# Altium PCB SeniorDesign.PcbDoc (part 1 of 2)
Units mil, origin at the board's own origin, x right, y up, seen from the top; angles counter-clockwise.
Board outline 3586 x 2237 mil, 4 copper layers (Top Layer, GND, PWR, Bottom Layer), stack 30.634 mil thick; 184 components, 148 nets, 619 pads, 132 vias.
Unrouted connection lines stored in the file: 8.
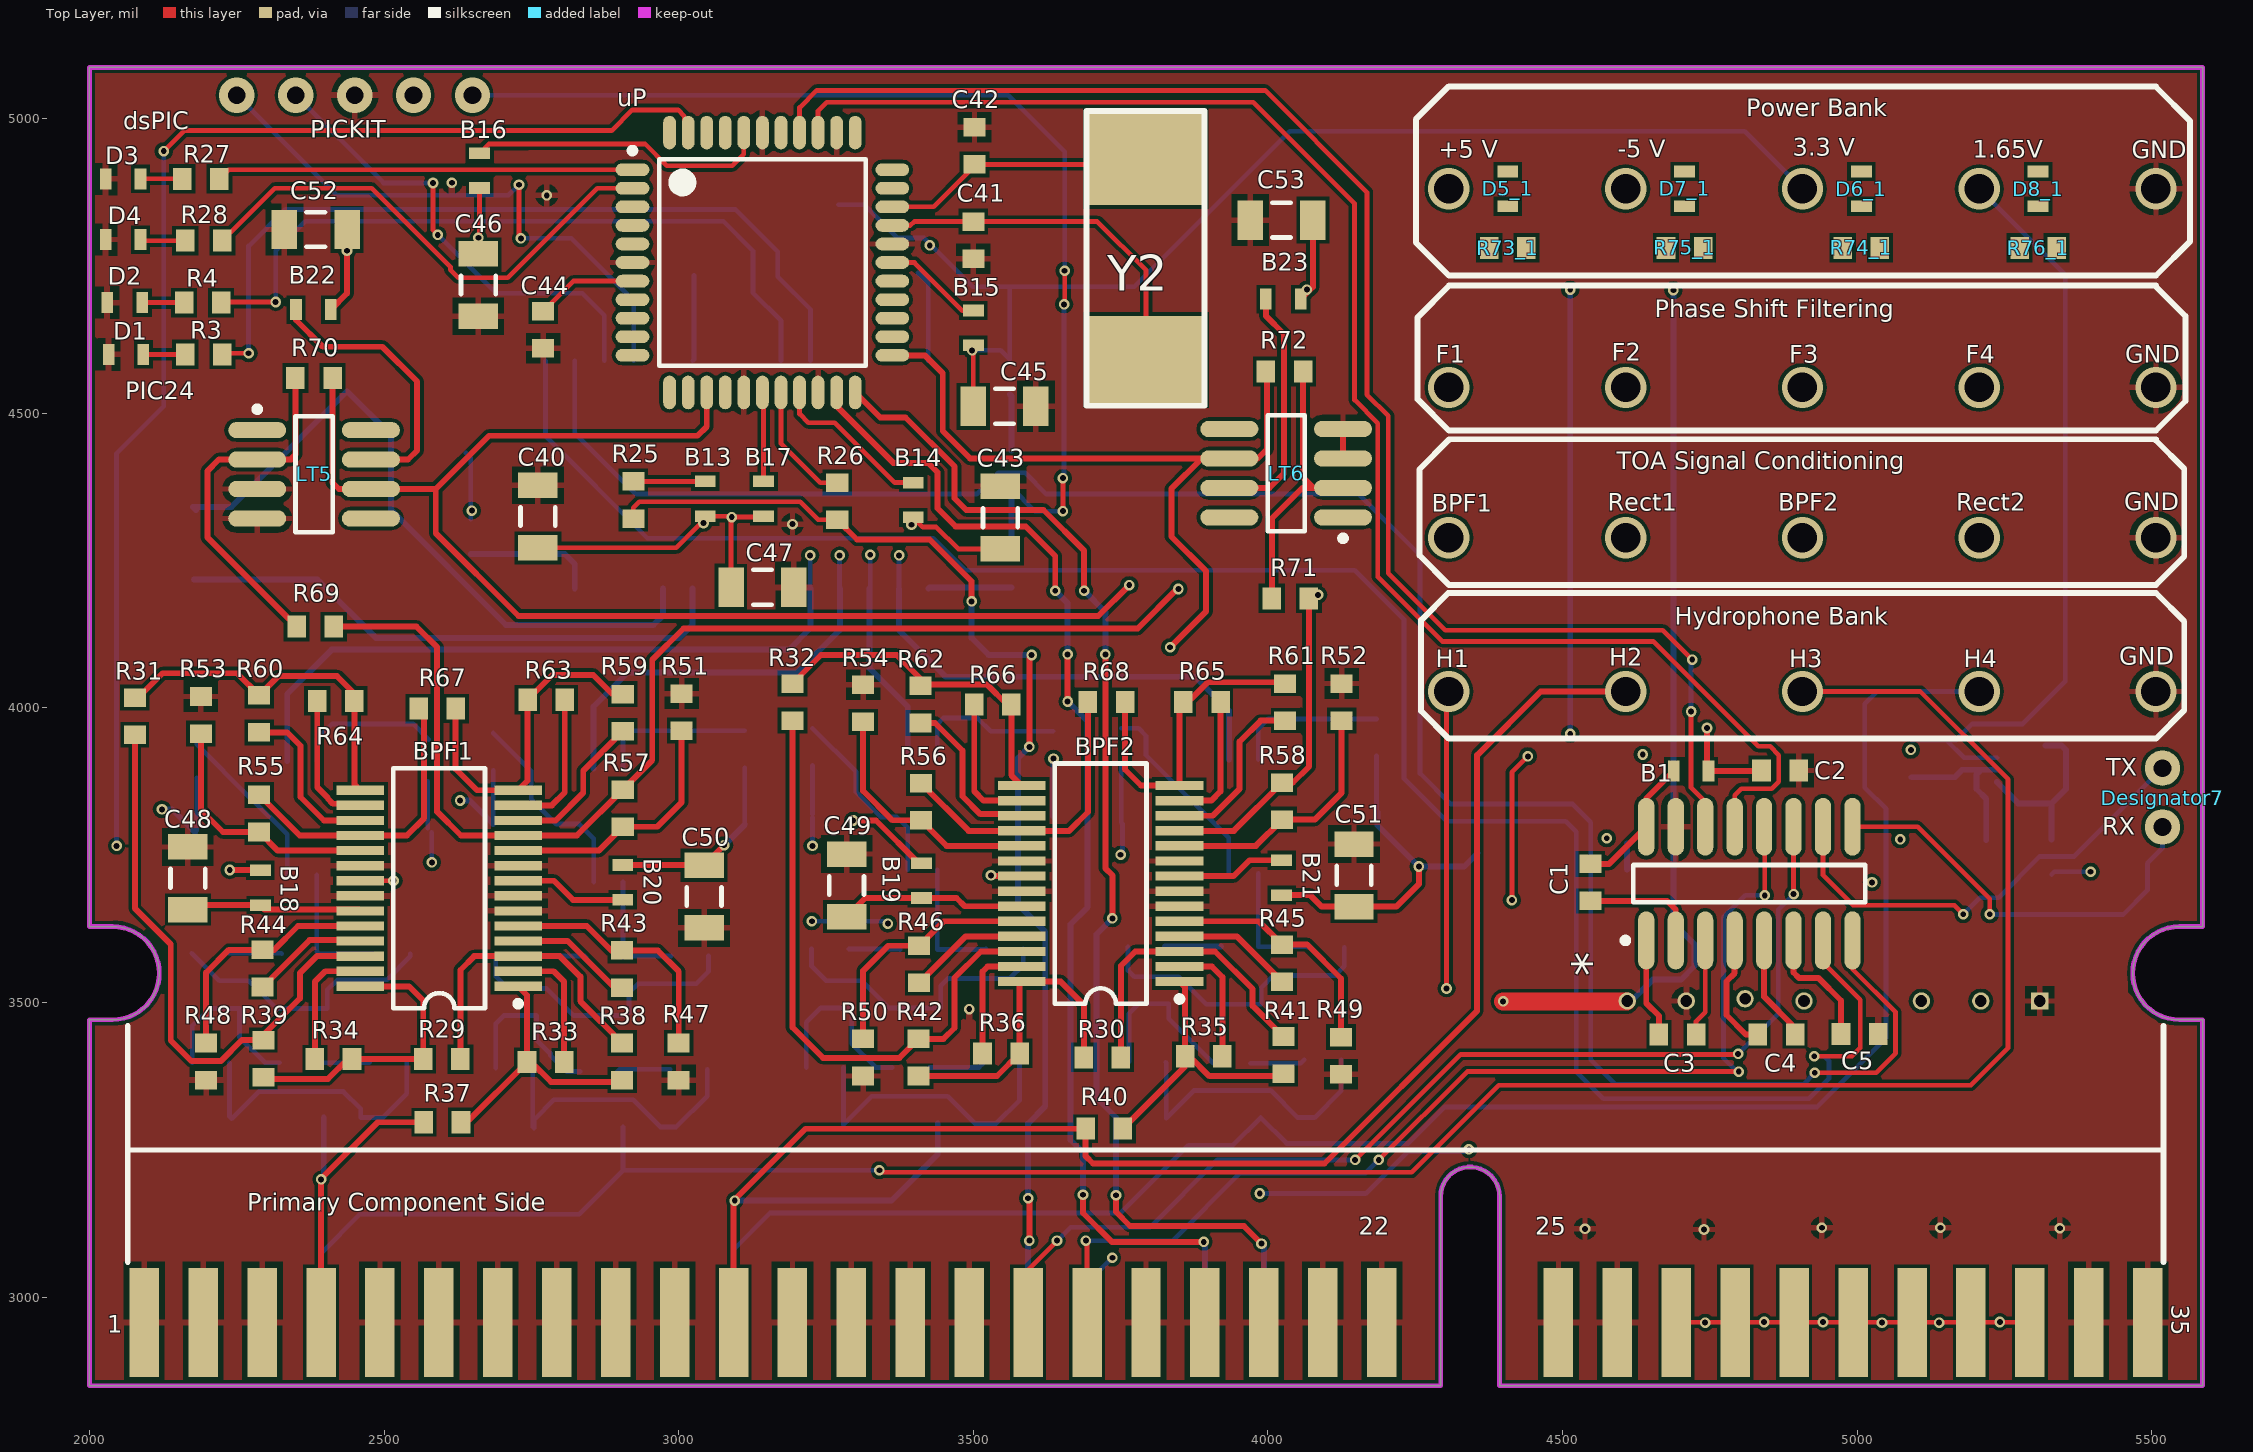
[diagram p0: Top Layer view]
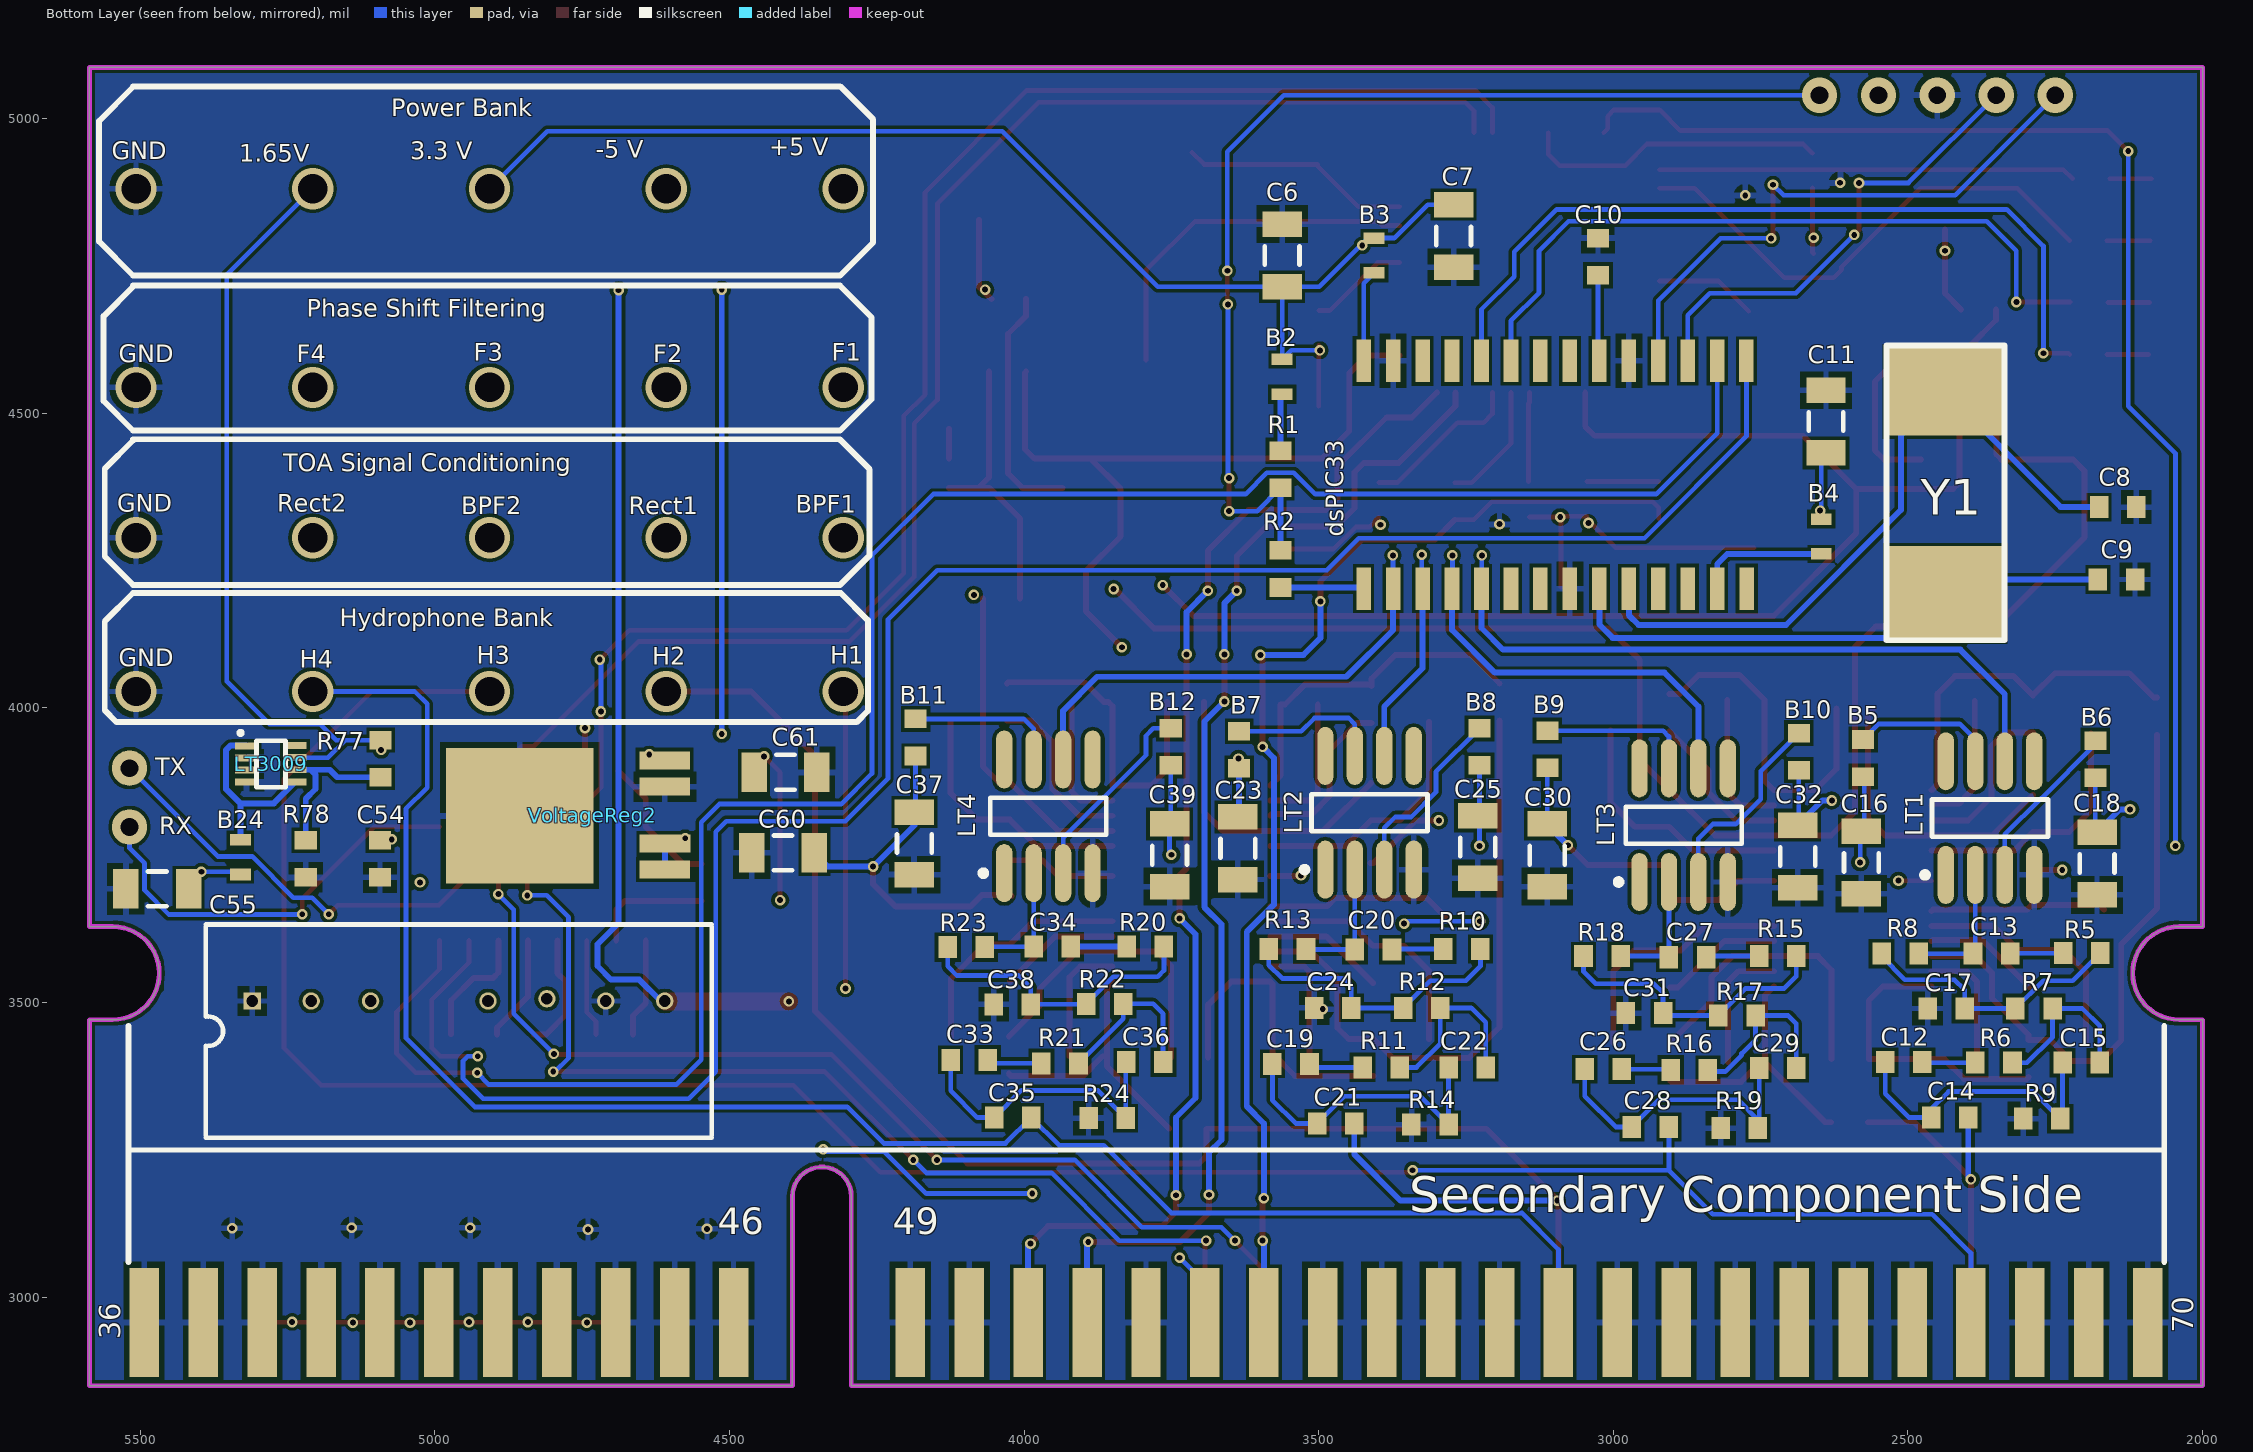
[diagram p1: Bottom Layer view, seen from below]
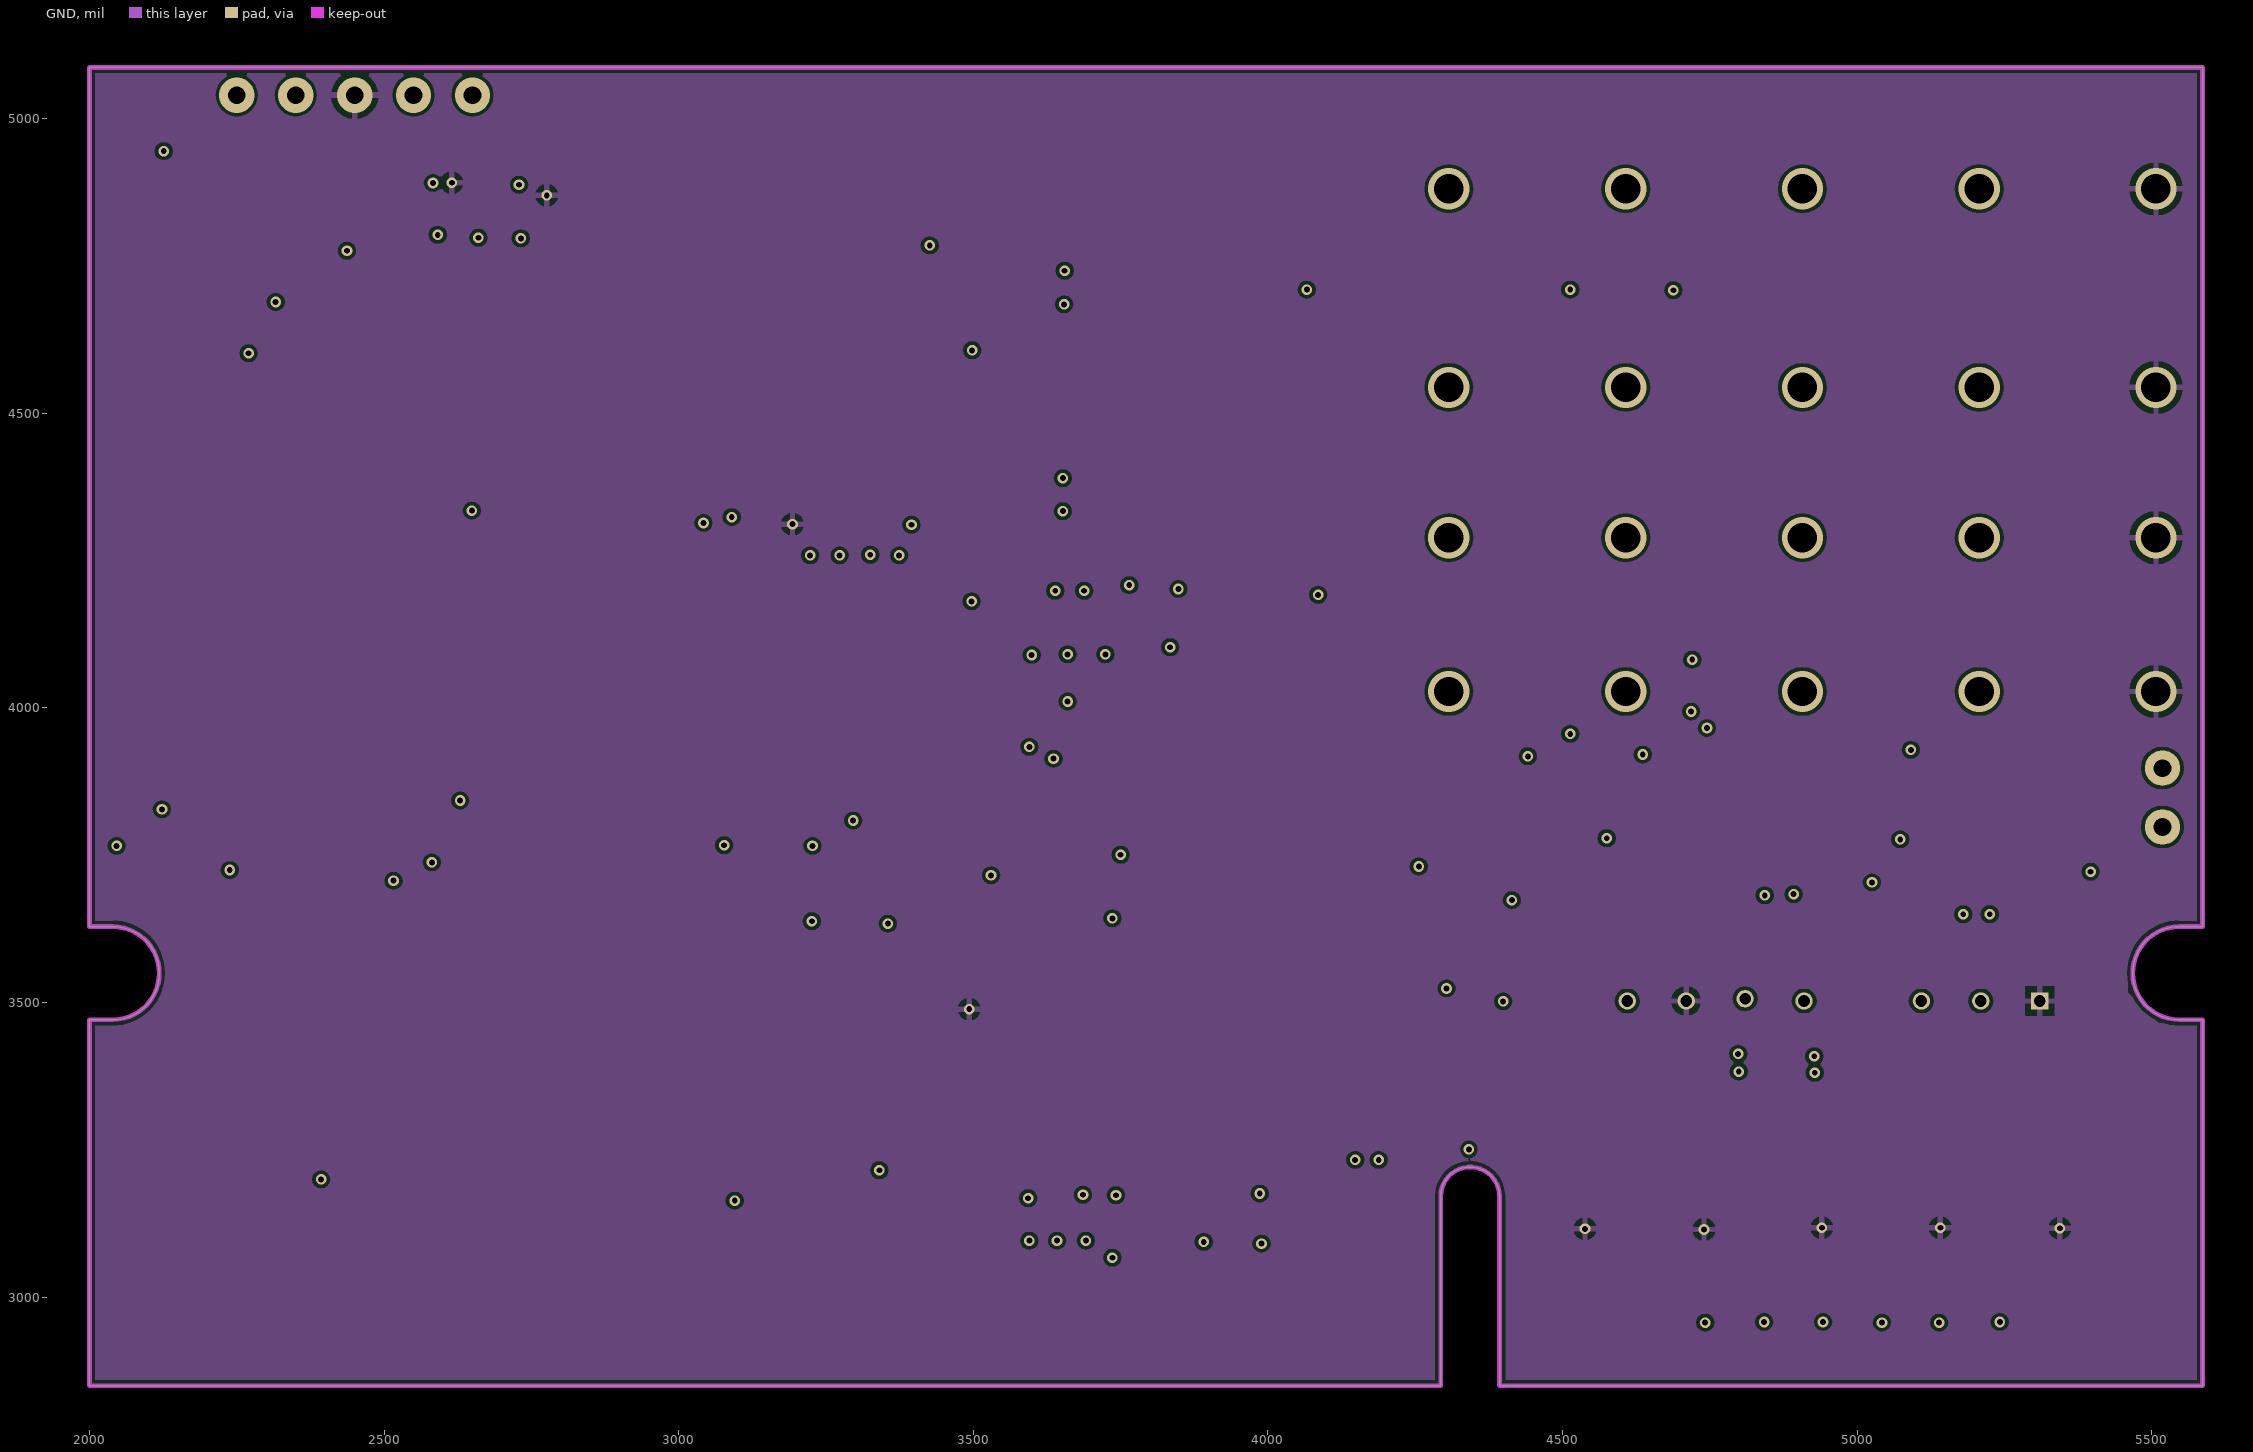
[diagram p2: GND]
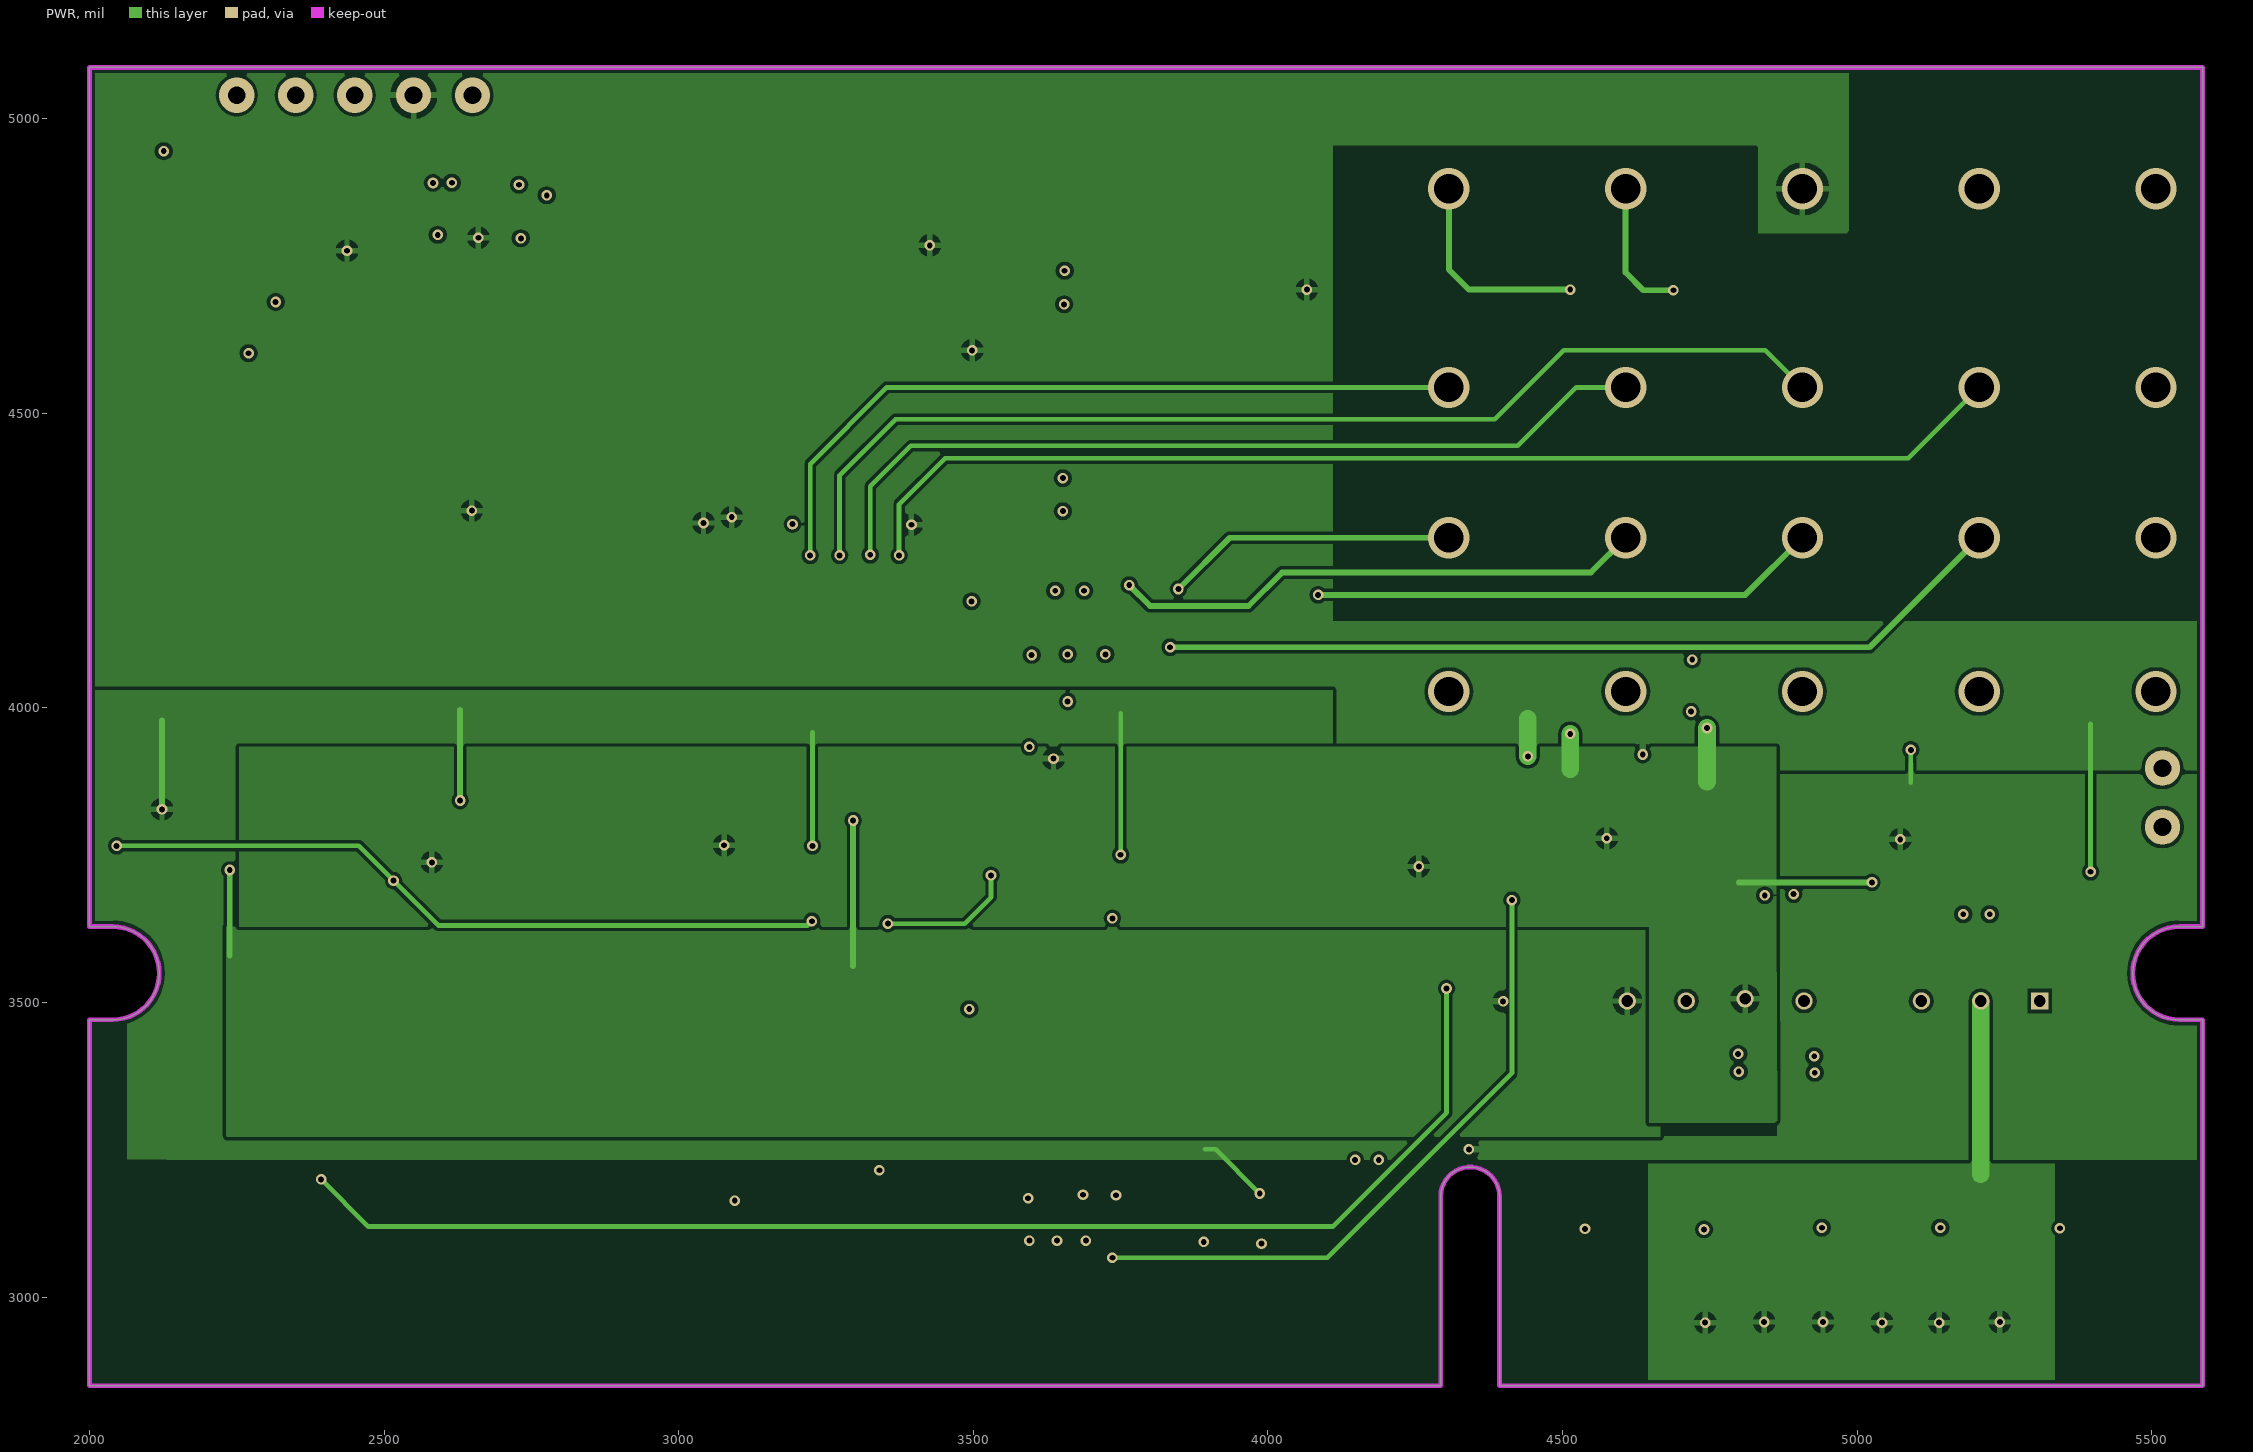
[diagram p3: PWR]
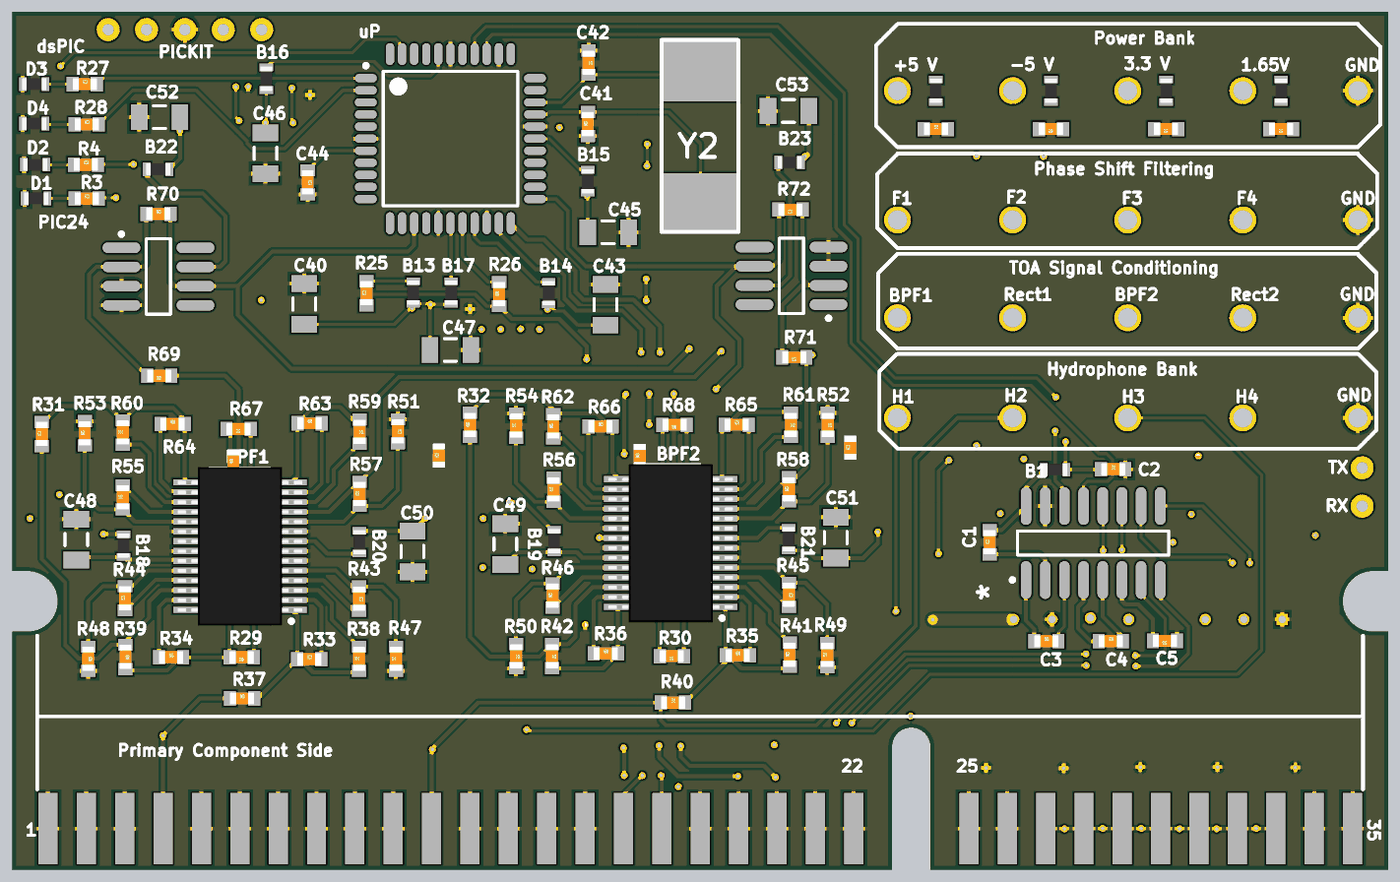
[diagram p5: 3D render of the assembled board from above, using the file's embedded part models]
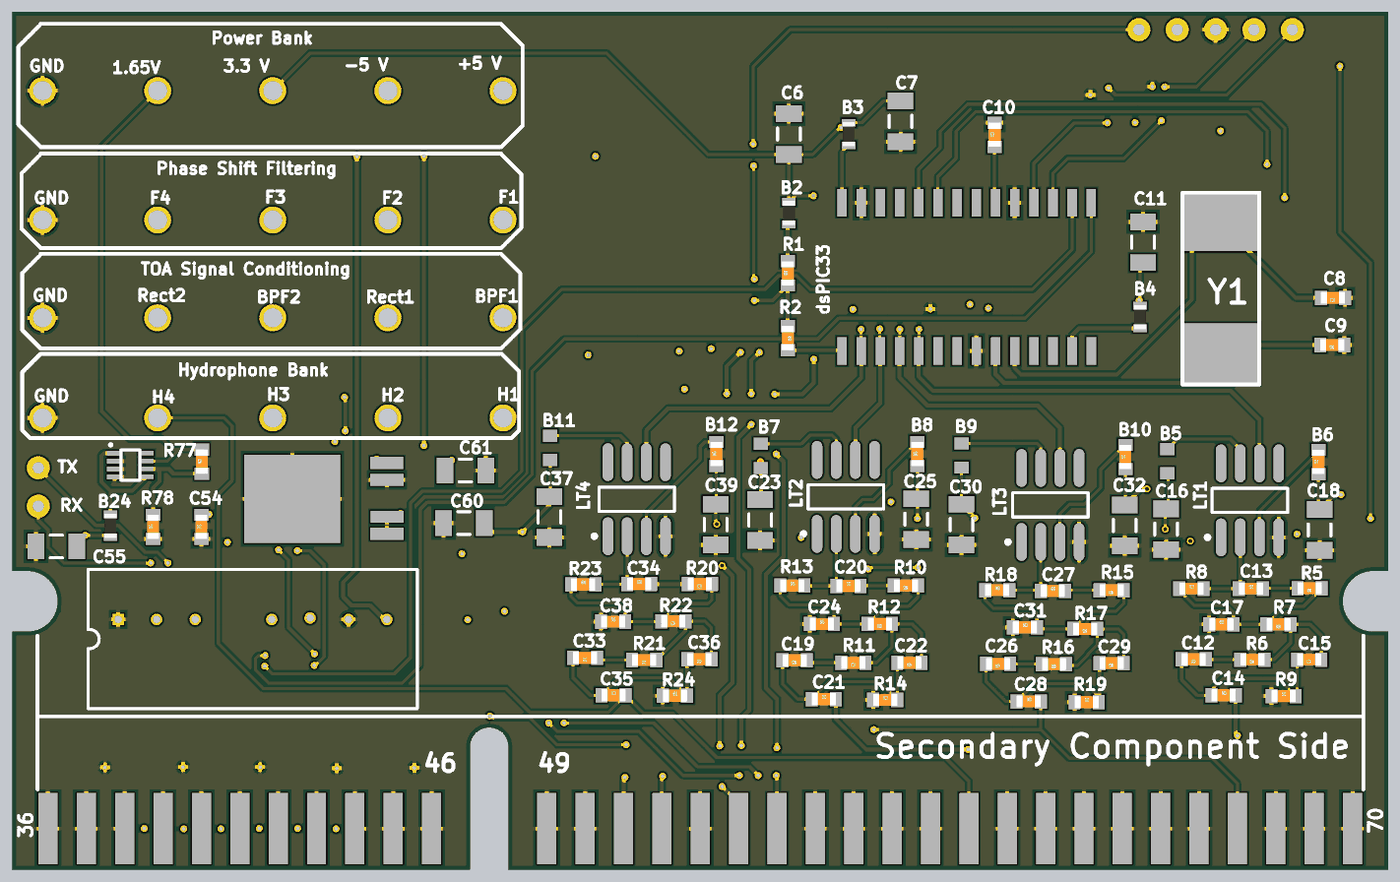
[diagram p6: 3D render of the assembled board from below, using the file's embedded part models]

## Layer stack, top to bottom
Top Solder: solder mask 0.4, Solder Resist, Dk 3.5
Top Layer: signal copper 1.4
Dielectric 1: core 10, FR-4, Dk 4.2
GND: signal copper 1.417
Dielectric 3: prepreg 5, Dk 4.2
PWR: signal copper 1.417
Dielectric 2: core 10, Dk 4.2
Bottom Layer: signal copper 1.4
Bottom Solder: solder mask 0.4, Solder Resist, Dk 3.5

## Board outline
2000,3471 2039.5,3471 ccw(c2039.5,3550) 2039.5,3629 2000,3629 2000,5087 5586,5087 5586,3629 5546.5,3629 ccw(c5546.5,3550) 5546.5,3471 5586,3471 5586,2850 4393,2850 4393,3171 ccw(c4343,3171) 4293,3171 4293,2850 2000,2850

## Design rules (kind name [scope] priority, off if disabled: settings)
Clearance [All] p1: gap=6
PolygonConnect [All] p1: connectstyle=Relief reliefconductorwidth=10 reliefentries=4 polygonreliefangle="90 Angle" airgapwidth=10
RoomDefinition Rectifiers [InComponentClass('Rectifiers')] p1 off: confinementstyle=ConfineIn formatcopy=TRUE lockcomponents=FALSE outline 0,0 2000,0 2000,1000 0,1000
RoomDefinition PowerSupply [InComponentClass('PowerSupply')] p2 off: confinementstyle=ConfineIn formatcopy=TRUE lockcomponents=FALSE outline 989,391 1662,391 1662,763 989,763
RoomDefinition PIC24Filter [InComponentClass('PIC24Filter')] p3 off: confinementstyle=ConfineIn formatcopy=TRUE lockcomponents=FALSE outline 0,0 2000,0 2000,1000 0,1000
RoomDefinition PIC24 [InComponentClass('PIC24')] p4 off: confinementstyle=ConfineIn formatcopy=TRUE lockcomponents=FALSE outline 0,0 2000,0 2000,1000 0,1000
RoomDefinition dsPIC_filter [InComponentClass('dsPIC_filter')] p5 off: confinementstyle=ConfineIn formatcopy=TRUE lockcomponents=FALSE outline 0,0 2000,0 2000,1000 0,1000
RoomDefinition dsPIC [InComponentClass('dsPIC')] p6 off: confinementstyle=ConfineIn formatcopy=TRUE lockcomponents=FALSE outline 0,0 2000,0 2000,1000 0,1000
RoomDefinition Comms [InComponentClass('Comms')] p7 off: confinementstyle=ConfineIn formatcopy=TRUE lockcomponents=FALSE outline 0,0 2000,0 2000,1000 0,1000
RoutingVias [All] p1: holewidth=12 width=25 viastyle="Through Hole" minholewidth=10 minwidth=18 maxholewidth=40 maxwidth=70
SolderMaskExpansion [All] p1: expansion=4
Width [All] p1: maxlimit=30 minlimit=6 preferedwidth=8 minimp=50.000000 maximp=50.000000 favimp=50.000000
29 further rules are at their usual default settings.

## Classes and differential pairs
component class PowerSupply: C60 C61
component class Comms: * B1 C1 C2 C3 C4 C5
component class dsPIC_filter: B5 B6 B7 B8 B9 B10 B11 B12 C12 C13 C14 C15 C16 C17 C18 C19 C20 C21 C22 C23 C24 C25 C26 C27 C28 C29 C30 C31 C32 C33 C34 C35 C36 C37 C38 C39 LT1 LT2 LT3 LT4 R5 R6 R7 R8 R9 R10 R11 R12 R13 R14 R15 R16 R17 R18 R19 R20 R21 R22 R23 R24
component class dsPIC: B2 B3 B4 C6 C7 C8 C9 C10 C11 D1 D2 dsPIC33 R1 R2 R3 R4 Y1
component class PIC24Filter: B18 B19 B20 B21 BPF1 BPF2 C48 C49 C50 C51 R29 R30 R31 R32 R33 R34 R35 R36 R37 R38 R39 R40 R41 R42 R43 R44 R45 R46 R47 R48 R49 R50 R51 R52 R53 R54 R55 R56 R57 R58 R59 R60 R61 R62 R63 R64 R65 R66 R67 R68
component class PIC24: B13 B14 B15 B16 B17 C40 C41 C42 C43 C44 C45 C46 C47 D3 D4 R25 R26 R27 R28 uP Y2
component class Rectifiers: B22 B23 C52 C53 LT5 LT6 R69 R70 R71 R72

## Components (designator, comment, footprint, x,y, rotation, side; value= is the part's Value field where it differs from the comment)
* "MAX232E" SO-16_M 4817,3702 r90 top
B1 "Ferrite Bead" "Resistor 0603" 4718,3893 r180 top
B2 "Ferrite Bead" "Resistor 0603" 3562,4562 r90 bottom
B3 "Ferrite Bead" "Resistor 0603" 3406,4768 r270 bottom
B4 "Ferrite Bead" "Resistor 0603" 2647,4291 r270 bottom
B5 "Ferrite Bead" "Capacitor 0603"#1 2576,3915 r270 bottom
B6 "Ferrite Bead" "Capacitor 0603"#2 2182,3913 r90 bottom
B7 "Ferrite Bead" "Capacitor 0603"#1 3635,3929 r270 bottom
B8 "Ferrite Bead" "Capacitor 0603"#2 3227,3934 r90 bottom
B9 "Ferrite Bead" "Capacitor 0603"#1 3112,3930 r270 bottom
B10 "Ferrite Bead" "Capacitor 0603"#2 2685,3926 r90 bottom
B11 "Ferrite Bead" "Capacitor 0603"#1 4184,3950 r270 bottom
B12 "Ferrite Bead" "Capacitor 0603"#2 3751,3934 r90 bottom
B13 "Ferrite Bead" "Resistor 0603" 3045,4355 r270 top
B14 "Ferrite Bead" "Resistor 0603" 3398,4353 r270 top
B15 "Ferrite Bead" "Resistor 0603" 3500,4645 r90 top
B16 "Ferrite Bead" "Resistor 0603" 2662,4912 r90 top
B17 "Ferrite Bead" "Resistor 0603" 3144,4355 r90 top
B18 "Ferrite Bead" "Resistor 0603" 2290,3695 r90 top
B19 "Ferrite Bead" "Resistor 0603" 3412,3707 r90 top
B20 "Ferrite Bead" "Resistor 0603" 2905,3704 r270 top
B21 "Ferrite Bead" "Resistor 0603" 4023,3712 r90 top
B22 "Ferrite Bead" "Resistor 0603" 2380,4676 r180 top
B23 "Ferrite Bead" "Resistor 0603" 4026,4694 r180 top
B24 "Ferrite Bead" "Resistor 0603" 5330,3747 r90 bottom
BPF1 "LTC1068-25IG SSOP-28" SSOP-28 2593.53,3694 r90 top
BPF2 "LTC1068-25IG SSOP-28" SSOP-28 3716,3702 r90 top
C1 "1uF Ceramic Low ESR" "Capacitor 0603"#2 4547,3704 r90 top
C2 "1uF Ceramic Low ESR" "Capacitor 0603"#2 4869,3894 r0 top
C3 "1uF Ceramic Low ESR" "Capacitor 0603"#2 4695,3446 r0 top
C4 "1uF Ceramic Low ESR" "Capacitor 0603"#2 4863,3446 r0 top
C5 "1uF Ceramic Low ESR" "Capacitor 0603"#2 5004,3447 r180 top
C6 "0.1uF 20V Ceramic Low ESR" C1206 3562,4768 r270 bottom
C7 "0.1uF 20V Ceramic Low ESR" C1206 3271,4801 r90 bottom
C8 "20pF" "Capacitor 0603"#2 2144,4341 r0 bottom
C9 "20pF" "Capacitor 0603"#2 2146,4218 r0 bottom
C10 "10uF 6.3V Ceramic or Tantalum Low ESR ~5 Ohm" "Capacitor 0603"#2 3026,4766 r90 bottom
C11 "0.1uF 20V Ceramic Low ESR" C1206 2639,4486 r270 bottom
C12 "0.0015uF" "Capacitor 0603"#2 2507,3399 r0 bottom
C13 "220pF" "Capacitor 0603"#2 2358,3583 r180 bottom
C14 "0.0015uF" "Capacitor 0603"#2 2429,3305 r180 bottom
C15 "0.0015uF" "Capacitor 0603"#2 2206,3398 r0 bottom
C16 ".1uF 20V Ceramic Low ESR" C1206 2579,3738 r270 bottom
C17 "0.0022uF" "Capacitor 0603"#2 2435,3490 r180 bottom
C18 ".1uF 20V Ceramic Low ESR" C1206 2179,3736 r270 bottom
C19 "0.0015uF" "Capacitor 0603"#2 3547,3396 r0 bottom
C20 "220pF" "Capacitor 0603"#2 3407,3590 r180 bottom
C21 "0.0015uF" "Capacitor 0603"#2 3471,3295 r180 bottom
C22 "0.0015uF" "Capacitor 0603"#2 3248,3390 r0 bottom
C23 ".1uF 20V Ceramic Low ESR" C1206 3637,3762 r270 bottom
C24 "0.0022uF" "Capacitor 0603"#2 3476,3491 r180 bottom
C25 ".1uF 20V Ceramic Low ESR" C1206 3230,3764 r270 bottom
C26 "0.0015uF" "Capacitor 0603"#2 3017,3387 r0 bottom
C27 "220pF" "Capacitor 0603"#2 2874,3577 r180 bottom
C28 "0.0015uF" "Capacitor 0603"#2 2937,3289 r180 bottom
C29 "0.0015uF" "Capacitor 0603"#2 2721,3389 r0 bottom
C30 ".1uF 20V Ceramic Low ESR" C1206 3112,3750 r270 bottom
C31 "0.0022uF" "Capacitor 0603"#2 2947,3482 r180 bottom
C32 ".1uF 20V Ceramic Low ESR" C1206 2687,3748 r270 bottom
C33 "0.0015uF" "Capacitor 0603"#2 4093,3403 r0 bottom
C34 "220pF" "Capacitor 0603"#2 3952,3595 r180 bottom
C35 "0.0015uF" "Capacitor 0603"#2 4019,3305 r180 bottom
C36 "0.0015uF" "Capacitor 0603"#2 3795,3399 r0 bottom
C37 ".1uF 20V Ceramic Low ESR" C1206 4186,3770 r270 bottom
C38 "0.0022uF" "Capacitor 0603"#2 4020,3497 r180 bottom
C39 ".1uF 20V Ceramic Low ESR" C1206 3753,3750 r270 bottom
C40 "0.1uF 20V Ceramic Low ESR" C1206 2761,4325 r270 top
C41 "20pF" "Capacitor 0603"#2 3500,4794 r90 top
C42 "20pF" "Capacitor 0603"#2 3502,4954 r270 top
C43 "0.1uF 20V Ceramic Low ESR" C1206 3546,4323 r270 top
C44 "10uF 6.3V Ceramic or Tantalum Low ESR ~5 Ohm" "Capacitor 0603"#2 2770,4642 r270 top
C45 "0.1uF 20V Ceramic Low ESR" C1206 3553,4512 r0 top
C46 "0.1uF 20V Ceramic Low ESR" C1206 2660,4718 r270 top
C47 "0.1uF 20V Ceramic Low ESR" C1206 3142,4205 r0 top
C48 ".1uF 20V Ceramic Low ESR" C1206 2167,3711 r90 top
C49 ".1uF 20V Ceramic Low ESR" C1206 3285,3699 r90 top
C50 ".1uF 20V Ceramic Low ESR" C1206 3043,3680 r270 top
C51 ".1uF 20V Ceramic Low ESR" C1206 4146,3716 r90 top
C52 ".1uF 20V Ceramic Low ESR" C1206 2384,4812 r180 top
C53 ".1uF 20V Ceramic Low ESR" C1206 4023,4828 r180 top
C54 "4.7uF 20V Ceramic" "Capacitor 0603"#2 5093,3744 r90 bottom
C55 ".1uF 20V Ceramic Low ESR" C1206 5471,3693 r0 bottom
C60 "15uF 20V Ceramic" C1206 4409,3754 r180 bottom
C61 "4.7uF 20V Ceramic" C1206 4405,3891 r0 bottom
D1 "LED2" "Resistor 0603" 2062,4600 r180 top
D2 "LED2" "Resistor 0603" 2060,4688 r180 top
D3 "LED2" "Resistor 0603" 2057,4898 r180 top
D4 "LED2" "Resistor 0603" 2057,4795 r180 top
D5_1 "LED2" "Resistor 0603" 4407,4881 r90 top (schematic designator D5)
D6_1 "LED2" "Resistor 0603" 5007,4881 r90 top (schematic designator D6)
D7_1 "LED2" "Resistor 0603" 4707,4881 r90 top (schematic designator D7)
D8_1 "LED2" "Resistor 0603" 5307,4881 r90 top (schematic designator D8)
Designator7 "Comment" "Header 2 Pin 2.54mm" 5518,3898 r0 top
dsPIC33 "dsPIC33EP64GS502" "SOIC 28" 3150,4034 r90 bottom
LT1 "LT1677 SO8 Package" SO8 2370,3809 r90 bottom
LT2 "LT1677 SO8 Package" SO8 3423,3818 r90 bottom
LT3 "LT1677 SO8 Package" SO8 2890,3797 r90 bottom
LT4 "LT1677 SO8 Package" SO8 3968,3812 r90 bottom
LT5 "LT1677 SO8 Package" SO8 2377,4406 r0 top
LT6 "LT1677 SO8 Package" SO8 4035,4389 r180 top
LT3009 "LT3009" "SC8 Package" 5278,3905 r180 bottom
R1 "1/16 w 10K ohms 1%" "Capacitor 0603"#2 3565,4405 r90 bottom
R2 "470" "Capacitor 0603"#2 3565,4236 r270 bottom
R3 "200 ohms 1%" "Capacitor 0603"#2 2194,4600 r0 top
R4 "200 ohms 1%" "Capacitor 0603"#2 2192,4688 r0 top
R5 "9.1K" "Capacitor 0603"#2 2205,3584 r0 bottom
R6 "6.8K" "Capacitor 0603"#2 2354,3398 r0 bottom
R7 "2K" "Capacitor 0603"#2 2286,3490 r0 bottom
R8 "7.5K" "Capacitor 0603"#2 2513,3583 r180 bottom
R9 "2K" "Capacitor 0603"#2 2273,3303 r180 bottom
R10 "9.1K" "Capacitor 0603"#2 3257,3591 r0 bottom
R11 "6.8K" "Capacitor 0603"#2 3394,3390 r0 bottom
R12 "2K" "Capacitor 0603"#2 3325,3491 r0 bottom
R13 "7.5K" "Capacitor 0603"#2 3553,3591 r180 bottom
R14 "2K" "Capacitor 0603"#2 3311,3293 r180 bottom
R15 "9.1K" "Capacitor 0603"#2 2721,3579 r0 bottom
R16 "6.8K" "Capacitor 0603"#2 2871,3386 r0 bottom
R17 "2K" "Capacitor 0603"#2 2790,3478 r0 bottom
R18 "7.5K" "Capacitor 0603"#2 3019,3579 r180 bottom
R19 "2K" "Capacitor 0603"#2 2786,3287 r180 bottom
R20 "9.1K" "Capacitor 0603"#2 3794,3595 r0 bottom
R21 "6.8K" "Capacitor 0603"#2 3939,3397 r0 bottom
R22 "2K" "Capacitor 0603"#2 3863,3498 r0 bottom
R23 "7.5K" "Capacitor 0603"#2 4098,3594 r180 bottom
R24 "2K" "Capacitor 0603"#2 3859,3304 r180 bottom
R25 "1/16 w 10K ohms 1%" "Capacitor 0603"#2 2923,4353 r90 top
R26 "470" "Capacitor 0603"#2 3269,4351 r90 top
R27 "200 ohms 1%" "Capacitor 0603"#2 2189,4898 r0 top
R28 "200 ohms 1%" "Capacitor 0603"#2 2194,4793 r0 top
R29 "1/16 118K watt 1%" "Capacitor 0603"#2 2598,3404 r180 top
R30 "1/16 118K watt 1%" "Capacitor 0603"#2 3719,3407 r180 top
R31 "1/16 47.5K watt 1%" "Capacitor 0603"#2 2077,3986 r90 top
R32 "1/16 47.5K watt 1%" "Capacitor 0603"#2 3193,4010 r90 top
R33 "1/16 4.99K watt 1%" "Capacitor 0603"#2 2774,3399 r0 top
R34 "1/16 4.99K watt 1%" "Capacitor 0603"#2 2414,3404 r0 top
R35 "1/16 4.99K watt 1%" "Capacitor 0603"#2 3891,3409 r0 top
R36 "1/16 4.99K watt 1%" "Capacitor 0603"#2 3547,3414 r0 top
R37 "1/16 121K watt 1%" "Capacitor 0603"#2 2599,3297 r0 top
R38 "1/16 97.4K watt 1%" "Capacitor 0603"#2 2904,3400 r90 top
R39 "1/16 130K watt 1%" "Capacitor 0603"#2 2295,3405 r270 top
R40 "1/16 121K watt 1%" "Capacitor 0603"#2 3722,3286 r0 top
R41 "1/16 97.4K watt 1%" "Capacitor 0603"#2 4026,3411 r90 top
R42 "1/16 130K watt 1%" "Capacitor 0603"#2 3407,3407 r270 top
R43 "1/16 4.99K watt 1%" "Capacitor 0603"#2 2904,3557 r270 top
R44 "1/16 4.99K watt 1%" "Capacitor 0603"#2 2294,3558 r90 top
R45 "1/16 4.99K watt 1%" "Capacitor 0603"#2 4024,3567 r270 top
R46 "1/16 4.99K watt 1%" "Capacitor 0603"#2 3408,3565 r90 top
R47 "1/16 8.87K watt 1%" "Capacitor 0603"#2 3000,3400 r90 top
R48 "1/16 9.53K watt 1%" "Capacitor 0603"#2 2198,3400 r270 top
R49 "1/16 8.87K watt 1%" "Capacitor 0603"#2 4124,3410 r90 top
R50 "1/16 9.53K watt 1%" "Capacitor 0603"#2 3313,3407 r270 top
R51 "1/16 6.49K watt 1%" "Capacitor 0603"#2 3005,3993 r270 top
R52 "1/16 6.49K watt 1%" "Capacitor 0603"#2 4125,4010 r270 top
R53 "1/16 6.98K watt 1%" "Capacitor 0603"#2 2189,3988 r90 top
R54 "1/16 6.98K watt 1%" "Capacitor 0603"#2 3313,4008 r90 top
R55 "1/16 4.99K watt 1%" "Capacitor 0603"#2 2288,3821 r90 top
R56 "1/16 4.99K watt 1%" "Capacitor 0603"#2 3411,3841 r90 top
R57 "1/16 4.99K watt 1%" "Capacitor 0603"#2 2905,3830 r90 top
R58 "1/16 4.99K watt 1%" "Capacitor 0603"#2 4024,3842 r90 top
R59 "1/16 124K watt 1%" "Capacitor 0603"#2 2905,3992 r270 top
R60 "1/16 102K watt 1%" "Capacitor 0603"#2 2288,3990 r90 top
R61 "1/16 124K watt 1%" "Capacitor 0603"#2 4029,4010 r270 top
R62 "1/16 102K watt 1%" "Capacitor 0603"#2 3410,4006 r90 top
R63 "1/16 4.99K watt 1%" "Capacitor 0603"#2 2775,4014 r0 top
R64 "1/16 4.99K watt 1%" "Capacitor 0603"#2 2418,4012 r0 top
R65 "1/16 4.99K watt 1%" "Capacitor 0603"#2 3888,4010 r0 top
R66 "1/16 4.99K watt 1%" "Capacitor 0603"#2 3533,4006 r0 top
R67 "1/16 78.7K watt 1%" "Capacitor 0603"#2 2590,3999 r180 top
R68 "1/16 78.7K watt 1%" "Capacitor 0603"#2 3726,4010 r180 top
R69 "1/16 118K watt 1%" "Capacitor 0603"#2 2383,4138 r180 top
R70 "1/16 118K watt 1%" "Capacitor 0603"#2 2381,4560 r0 top
R71 "1/16 118K watt 1%" "Capacitor 0603"#2 4038,4186 r180 top
R72 "1/16 118K watt 1%" "Capacitor 0603"#2 4028,4571 r180 top
R73_1 "200 ohms 1%" "Capacitor 0603"#2 4407,4781 r0 top (schematic designator R73)
R74_1 "200 ohms 1%" "Capacitor 0603"#2 5007,4781 r180 top (schematic designator R74)
R75_1 "200 ohms 1%" "Capacitor 0603"#2 4707,4781 r180 top (schematic designator R75)
R76_1 "200 ohms 1%" "Capacitor 0603"#2 5307,4781 r180 top (schematic designator R76)
R77 "1.03 M 603" "Capacitor 0603"#2 5092,3914 r90 bottom
R78 "590 K 603" "Capacitor 0603"#2 5219,3744 r90 bottom
uP "PIC24FJ32GB004-I/PT" TQFP-PT44_L 3142,4756 r0 top
VoltageReg2 "NCP5500DT33RKG DPAK-5" DPAK5 4856,3817 r90 bottom
Y1 "XTAL" "SMD Oscillator" 2536,4615 r270 bottom
Y2 "XTAL" "SMD Oscillator" 3892,4513 r90 top
? "RS3-5050D +/- 5V LR" "+/- 5 V LR" 5007,3461 r180 bottom

## Footprints (in the part's own frame and the unit in brackets; to place one, negate y for a bottom-side part, rotate by r counter-clockwise, add the part's x,y. Pads: shape width x height; smd on the part's side, far side on the other; paste and mask are expansions set on the pad)
"+/- 5 V LR" [mm]
  rect 0.75x0.75 hole 0.5: 1(-7.69,1.06)
  round 0.75 hole 0.5: 2(-5.15,1.06) 2(-2.59,1.06) 2(2.47,1.06) 2(5.01,1.157) 2(7.55,1.06) 2(10.09,1.06)
  silkscreen extent -9.69,-4.84 12.11,4.36
C1206 [mm] "Chip Capacitor, Body 3.2x1.6mm, IPC High Density"
  rect 1.1x1.7 smd: 1(-1.35,0) 2(1.35,0)
  silkscreen extent -0.4,-0.75 0.4,0.75, body extent -1.7,-0.9 1.7,0.9, height 1.3
"Capacitor 0603"#1 [mm]
  rect 0.8x0.95 smd: 1(0.8,0) 2(-0.8,0)
  body extent -0.8,-0.4 0.8,0.4, height 0.29
"Capacitor 0603"#2 [mm]
  rect 0.8x0.95 smd: 1(-0.8,0) 2(0.8,0)
  body extent -0.8,-0.4 0.8,0.4, height 0.29
DPAK5 [mil]
  rect 31x86 smd: 1(-90.94,-246.46) 2(-46.85,-246.85) 4(49.61,-246.46) 5(93.7,-246.06)
  rect 230x250 smd: 3(0,0)
"Header 2 Pin 2.54mm" [mil]
  round 60 hole 30: 1(0,0) 2(0,-100)
"Resistor 0603" [mm]
  rect 0.5x0.9 smd: 1(-0.75,0) 2(0.75,0)
  body extent -0.8,-0.4 0.8,0.4, height 0.39
"SC8 Package" [mm]
  rect 1x0.3 smd: 1(-1.05,0.78) 2(-1.05,0.26) 3(-1.05,-0.26) 4(-1.05,-0.78) 5(1.04,-0.77) 6(1.04,-0.25) 7(1.04,0.27) 8(1.04,0.79)
  silkscreen extent -1.36,-1 0.63,1.39
"SMD Oscillator" [mm]
  rect 3.81x5.08 smd: 1(1.97,2.51)
  rect 4.064x5.08 smd: 2(10.68,2.53)
  silkscreen extent 0,0 12.7,5.08
SO8 [mm]
  oval 2.5x0.7 smd: 1(-2.345,1.666) 2(-2.345,0.396) 3(-2.345,-0.874) 4(-2.345,-2.144) 5(2.555,-2.144) 6(2.555,-0.874) 7(2.555,0.396) 8(2.555,1.666)
  silkscreen extent -2.47,-2.74 0.91,2.69, body extent -1.9,-2.74 2.11,2.26, height 1.75
SO-16_M [mm] "SOIC, 16-Leads, Body 9.9x3.9mm, Pitch 1.27mm, IPC Low Density"
  oval 2.5x0.7 smd: 1(-2.45,4.445) 2(-2.45,3.175) 3(-2.45,1.905) 4(-2.45,0.635) 5(-2.45,-0.635) 6(-2.45,-1.905) 7(-2.45,-3.175) 8(-2.45,-4.445) 9(2.45,-4.445) 10(2.45,-3.175) 11(2.45,-1.905) 12(2.45,-0.635) 13(2.45,0.635) 14(2.45,1.905) 15(2.45,3.175) 16(2.45,4.445)
  silkscreen extent -2.57,-5 0.8,5.47, body extent -2,-5 2,5, height 1.75
"SOIC 28" [mm]
  round 0.5 on Mech13: 1(3.84,7.82)
  rect 1.83x0.63 smd: 1(4.28,6.95) 2(4.28,5.68) 3(4.28,4.41) 4(4.28,3.14) 5(4.28,1.87) 6(4.28,0.6) 7(4.28,-0.67) 8(4.28,-1.94) 9(4.28,-3.21) 10(4.28,-4.48) 11(4.28,-5.75) 12(4.28,-7.02) 13(4.28,-8.29) 14(4.28,-9.56) 15(14.1,-9.55) 16(14.1,-8.29) 17(14.1,-7.02) 18(14.1,-5.75) 19(14.1,-4.48) 20(14.1,-3.21) 21(14.1,-1.94) 22(14.1,-0.67) 23(14.1,0.6) 24(14.1,1.87) 25(14.1,3.14) 26(14.1,4.41) 27(14.1,5.68) 28(14.1,6.95)
SSOP-28 [mm] "SSOP, Plastic; 28 Leads; Body Width 5.2 mm; Pitch 0.65 mm"
  rect 0.4x2.05 smd: 1(-4.225,-3.4) 2(-3.575,-3.4) 3(-2.925,-3.4) 4(-2.275,-3.4) 5(-1.625,-3.4) 6(-0.975,-3.4) 7(-0.325,-3.4) 8(0.325,-3.4) 9(0.975,-3.4) 10(1.625,-3.4) 11(2.275,-3.4) 12(2.925,-3.4) 13(3.575,-3.4) 14(4.225,-3.4) 15(4.225,3.4) 16(3.575,3.4) 17(2.925,3.4) 18(2.275,3.4) 19(1.625,3.4) 20(0.975,3.4) 21(0.325,3.4) 22(-0.325,3.4) 23(-0.975,3.4) 24(-1.625,3.4) 25(-2.275,3.4) 26(-2.925,3.4) 27(-3.575,3.4) 28(-4.225,3.4)
  silkscreen extent -5.18,-3.52 5.17,1.97, body extent -5.26,-4.11 5.24,4.11, height 1.92
TQFP-PT44_L [mm] "Thin QFP, 44-Leads, Body 10x10mm, Pitch 0.8mm, IPC High Density"
  oval 1.45x0.55 smd: 1(-5.6,4) 2(-5.6,3.2) 3(-5.6,2.4) 4(-5.6,1.6) 5(-5.6,0.8) 6(-5.6,0) 7(-5.6,-0.8) 8(-5.6,-1.6) 9(-5.6,-2.4) 10(-5.6,-3.2) 11(-5.6,-4) 23(5.6,-4) 24(5.6,-3.2) 25(5.6,-2.4) 26(5.6,-1.6) 27(5.6,-0.8) 28(5.6,0) 29(5.6,0.8) 30(5.6,1.6) 31(5.6,2.4) 32(5.6,3.2) 33(5.6,4)
  oval 0.55x1.45 smd: 12(-4,-5.6) 13(-3.2,-5.6) 14(-2.4,-5.6) 15(-1.6,-5.6) 16(-0.8,-5.6) 17(0,-5.6) 18(0.8,-5.6) 19(1.6,-5.6) 20(2.4,-5.6) 21(3.2,-5.6) 22(4,-5.6) 34(4,5.6) 35(3.2,5.6) 36(2.4,5.6) 37(1.6,5.6) 38(0.8,5.6) 39(0,5.6) 40(-0.8,5.6) 41(-1.6,5.6) 42(-2.4,5.6) 43(-3.2,5.6) 44(-4,5.6)
  silkscreen extent -5.72,-4.45 4.45,4.95, body extent -5,-5 5,5, height 1.2

## Part data
*: library part max232
BPF1 BPF2: library part LTC1068
C1 C2 C3 C4 C5 C6 C7 C8 C9 C10 C11 C16 C18 C23 C25 C30 C32 C37 C39 C40 C41 C42 C43 C44 C45 C46 C47 C48 C49 C50 C51 C52 C53 C54 C55 C60 C61: library part "Cap Semi", "Capacitor (Semiconductor SIM Model)"
C12 C13 C14 C15 C17 C19 C20 C21 C22 C24 C26 C27 C28 C29 C31 C33 C34 C35 C36 C38: library part Cap, "Capacitor"
D1 D2 D3 D4 D5_1 D6_1 D7_1 D8_1: "Typical RED, GREEN, YELLOW, AMBER GaAs LED"
LT1 LT2 LT3 LT4 LT5 LT6: library part LT1677
R1 R2 R3 R4 R25 R26 R27 R28 R29 R30 R31 R32 R33 R34 R35 R36 R37 R38 R39 R40 R41 R42 R43 R44 R45 R46 R47 R48 R49 R50 R51 R52 R53 R54 R55 R56 R57 R58 R59 R60 R61 R62 R63 R64 R65 R66 R67 R68 R69 R70 R71 R72 R73_1 R74_1 R75_1 R76_1 R77 R78: library part Res3, "Resistor"
R5 R6 R7 R8 R9 R10 R11 R12 R13 R14 R15 R16 R17 R18 R19 R20 R21 R22 R23 R24: library part Res1, "Resistor"
uP: "16-Bit Flash Microcontroller with USB On-The-Go and nanoWatt XLP, 32KB Flash, 8KB SRAM, 44-Pin TQFP, Industrial Temperature"
VoltageReg2: library part "NCV5500 LDO DPAK-5"
Y1 Y2: "Crystal Oscillator"

## Free pads (board coordinates)
  rect 50x185 smd: 1(2093,2957.5) 2(2193,2957.5) 3(2293,2957.5) 4(2393,2957.5) 5(2493,2957.5) 6(2593,2957.5) 7(2693,2957.5) 8(2793,2957.5) 9(2893,2957.5) 10(2993,2957.5) 11(3093,2957.5) 12(3193,2957.5) 13(3293,2957.5) 14(3393,2957.5) 15(3493,2957.5) 16(3593,2957.5) 17(3693,2957.5) 18(3793,2957.5) 19(3893,2957.5) 20(3993,2957.5) 21(4093,2957.5) 22(4193,2957.5) 25(4493,2957.5) 26(4593,2957.5) 27(4693,2957.5) 28(4793,2957.5) 29(4893,2957.5) 30(4993,2957.5) 31(5093,2957.5) 32(5193,2957.5) 33(5293,2957.5) 34(5393,2957.5) 35(5493,2957.5)
  rect 50x185 smd far side: 36(5493,2957.5) 37(5393,2957.5) 38(5293,2957.5) 39(5193,2957.5) 40(5093,2957.5) 41(4993,2957.5) 42(4893,2957.5) 43(4793,2957.5) 44(4693,2957.5) 45(4593,2957.5) 46(4493,2957.5) 49(4193,2957.5) 50(4093,2957.5) 51(3993,2957.5) 52(3893,2957.5) 53(3793,2957.5) 54(3693,2957.5) 55(3593,2957.5) 56(3493,2957.5) 57(3393,2957.5) 58(3293,2957.5) 59(3193,2957.5) 60(3093,2957.5) 61(2993,2957.5) 62(2893,2957.5) 63(2793,2957.5) 64(2693,2957.5) 65(2593,2957.5) 66(2493,2957.5) 67(2393,2957.5) 68(2293,2957.5) 69(2193,2957.5) 70(2093,2957.5)

## Via types
v1: diameter 18, hole 10, Top Layer to Bottom Layer, 107 vias
v2: diameter 70, hole 50, Top Layer to Bottom Layer, 20 vias
v3: diameter 60, hole 30, Top Layer to Bottom Layer, 5 vias

## Nets (pads, with @x,y where several pads share a name; then routed paths per layer and width w, separated by ;. In a path a pad name is that pad's centre, name@x,y a point inside that pad or via, vN(x,y) a via of type N, cw(c..) or ccw(c..) an arc to the next point about the centre after c; other vN are vias at no path point)
"1.65 V": B6.1 B8.1 B10.1 B12.1 C18.1 C25.1 C32.1 C39.1 C54.2 LT3009.7 R77.2 | length 3214.4
  PWR w8: v1(3227,3766) 3227,3959 ; v1(3750,3751) 3750,3991 ; 3893,3251 3911,3251 v1(3986,3176) ; 5091,3873 v1(5091,3929)
  PWR w10: v1(2123,3828) 2123,3979 ; v1(2629,3843) 2629,3997
  Bottom Layer w8: C18.1@2179,3789.15 2182,3792.15 B6.1@2182,3881.5 ; C32.1@2685,3803.15 B10.1@2685,3894.5 ; v1(3227,3766) C25.1@3227,3814.15 ; C25.1@3227,3820.15 B8.1@3227,3902.5 ; v1(3750,3751) 3753,3754 C39.1@3753,3803.15 3751,3805.15 B12.1@3751,3902.5 ; v1(3986,3176) 4166,3176 4237,3247 4337,3247 v1(4341,3251) ; R77.2@5092,3945.5 5151.5,3945.5 ; v2(5207,4881) 5353,4735 5353,4045 5281,3973 5195,3973 5167.5,3945.5 5151.5,3945.5 ; LT3009.7@5237.06,3915.63 5181.37,3915.63 5151.5,3945.5
  Bottom Layer w10: v1(2123,3828) 2140.15,3828 C18.1@2179,3789.15 ; v1(2629,3843) 2645.15,3843 C32.1@2685,3803.15
  other v1: 5073,3777
"3.3 V": B2.2 B3.1 B4.1 B13.2 B14.2 B15.1 B16.1 B17.1 B22.1 B23.1 B24.1 C6.2 C7.2 C11.2 C40.2 C43.2 C45.1 C46.1 C47.1 C52.1 C53.1 C55.1 C61.2 pad.54 VoltageReg2.5 | length 5215.7
  Top Layer w8: C46.1@2660,4771.15 2662,4773.15 B16.1@2662,4882.47 ; C40.2@2761,4271.85 2995.85,4271.85 3045,4321 B13.2@3045,4325.47 v1@3091.53,4325.47 ; C47.1@3088.85,4205 v1@3088.85,4319.85 ; v1@3093,4324 B17.1@3142.53,4324 ; B14.2@3398,4323.47 3414.47,4307 3437,4307 3474.15,4269.85 C43.2@3546,4269.85 ; C45.1@3499.85,4512 3500,4512.15 B15.1@3500,4615.47 ; v1(4414,3674) 4414,3891 v1(4441,3918)
  Top Layer w10: B22.1@2409.53,4676 2437.15,4703.62 C52.1@2437.15,4812 ; B23.1@4055.53,4694 4076.15,4714.62 C53.1@4076.15,4828
  PWR w8: v1(3736,3067) 4101,3067 4414,3380 v1(4414,3674) ; v1(5396,3722) 5396,3973
  PWR w30: v1(4441,3918) 4441,3982
  Bottom Layer w8: C11.2@2639,4432.85 2647,4424.85 B4.1@2647,4320.53 ; C7.2@3271,4854.15 3314.85,4854.15 3371.47,4797.53 B3.1@3406,4797.53 3416.47,4797.53 3499.15,4714.85 C6.2@3562,4714.85 ; v1(3498,4607) 3546.53,4607 B2.2@3562,4591.53 C6.2@3562,4714.85 ; pad.54@3693,2957.5 3693,3024 v1(3736,3067) ; v2(4907,4881) 4809,4979 4037,4979 3772.85,4714.85 C6.2@3562,4714.85 ; B24.1@5330,3717.47 5334.53,3722 v1(5396,3722)
  other v1: 4636,3921 3395,4311 3042,4314 3090,4324 2649,4335 4066,4710 2437,4776 3426,4785 2660,4798
  other v3: 2550,5040
"232 RX (DSPIC)": *.9 Designator7.2 | length 712.4
  Top Layer w8: *.9@4992,3798.46 5102.54,3798.46 5225,3676 v1(5225,3650)
  Bottom Layer w8: v1(5225,3650) 5225.46,3649.54 5451.54,3649.54 5492.5,3690.5 5492.5,3736.46 5518,3761.97 Designator7.2@5518,3798
"232 RX (PIC24)": *.12 pad.17 | length 1842.9
  Top Layer w8: v1(3691,3096) 3693,3094 pad.17@3693,2957.5 ; v1(4188,3233) 4338,3383 v1(4799,3383) ; *.12@4842,3798.46 4843,3797.46 v1(4843,3682)
  Bottom Layer w8: v1(3691,3096) 3838,3096 3953,3211 4166,3211 v1(4188,3233) ; v1(4799,3383) 4796,3383 4773,3406 4773,3645 4810,3682 v1(4843,3682)
"232 TX (DSPIC)": *.10 Designator7.1 | length 788.5
  Top Layer w8: *.10@4942,3798.46 4942,3716 4993,3665 5165,3665 v1(5180,3650)
  Bottom Layer w8: v1(5180,3650) 5208,3678 5240,3678 5310,3748 5368,3748 Designator7.1@5518,3898
"232 TX (PIC24)": *.11 pad.16 | length 1870.5
  Top Layer w8: pad.16@3593,2957.5 3593,3047 v1(3642,3096) ; v1(4148,3233) 4327,3412 4797,3412 v1(4798,3413) ; v1(4892,3684) *.11@4892,3798.46
  Bottom Layer w8: v1(3642,3096) 3665,3119 3800,3119 3914,3233 v1(4148,3233) ; v1(4798,3413) 4866,3481 4866,3658 v1(4892,3684)
"+5 V": ?.2@4809.76,3506.55 B1.1 B5.1 B7.1 B9.1 B11.1 B20.1 B21.1 C2.1 C16.1 C23.1 C30.1 C37.1 C50.1 C51.1 C60.2 VoltageReg2.1 VoltageReg2.2 | length 2884.6
  Top Layer w10: B20.1@2901.47,3730 B20.1@2905,3733.53 3042.62,3733.53 C50.1@3043,3733.15 3076.85,3767 v1(3077,3767) ; B21.1@4021.53,3681 B21.1@4023,3682.47 4071.53,3682.47 4091.15,3662.85 C51.1@4146,3662.85 4217.85,3662.85 4256,3701 v1(4256,3731) ; v1(4745,3966) 4745,3895.53 B1.1@4747.53,3893 4836.5,3893 C2.1@4837.5,3894
  PWR w10: v2(4307,4881) 4307,4744 4341,4710 v1(4513,4710) ; 4799,3704 v1(5025,3704)
  PWR w30: 4513,3896 v1(4513,3956) ; 4745,3875 v1(4745,3966)
  Bottom Layer w8: C16.1@2574,3796.15 B5.1@2574,3875.47 ; v1(2581,3738) C16.1@2581,3789.15 ; C30.1@3112,3803.15 B9.1@3112,3898.5 ; B11.1@4184,3918.5 4184,3825.15 C37.1@4186,3823.15
  Bottom Layer w10: v1(3077,3767) 3112,3802 C30.1@3112,3803.15 ; v1(3636,3914) 3636,3898.5 B7.1@3635,3897.5 3635,3817.15 C23.1@3637,3815.15 ; C37.1@4186,3823.15 4186,3801 v1(4256,3731) 4332.85,3731 C60.2@4355.85,3754 ; v1(4513,3956) v1(4513,4710) ; VoltageReg2.2@4609.54,3769.76 VoltageReg2.1@4609.54,3726.06 VoltageReg2.1@4613,3729.51
  other v1: 4575,3779
"-5 V": ?.2@4609.76,3502.73 B18.2 B19.2 | length 2339.1
  Top Layer w10: v1(2238,3725) 2289.53,3725 B18.2@2290,3724.53 B18.2@2291.47,3726 ; v1(3296,3809) 3334.72,3809 3407.19,3736.53 B19.2@3412,3736.53 B19.2@3412.47,3737
  Top Layer w30: v1(4399,3502) ?.2@4609.02,3502
  PWR w10: 2238,3580 v1(2238,3725) ; 3296,3562 v1(3296,3809) ; v2(4607,4881) 4607,4739 4637,4709 v1(4688,4709)
  Bottom Layer w10: ?.2@4609.76,3502.73 4616.73,3502.73 4653,3539 4701,3539 4724,3562 4724,3599 4688,3635 v1(4688,4709)
F1P1: BPF1.1 R33.1 R37.2 R38.1 | length 466
  Top Layer w10: R37.2@2630.5,3297 2640.5,3297 R33.1@2742.5,3399 ; BPF1.1@2727.39,3527.66 2742.5,3512.54 R33.1@2742.5,3399 ; R38.1@2904,3368.5 2900.8,3365.3 2783.53,3365.3 2749.83,3399 R33.1@2742.5,3399
F1P2: BPF1.2 R33.2 | length 222
  Top Layer w10: BPF1.2@2727.39,3553.25 2787.75,3553.25 2805.5,3535.5 R33.2@2805.5,3399
F1P3: BPF1.3 R29.1 R38.2 | length 521
  Top Layer w10: R29.1@2629.5,3404 2629.5,3555.5 2652.84,3578.84 BPF1.3@2727.39,3578.84 2798.16,3578.84 2833,3544 2833,3502.5 R38.2@2904,3431.5
F1P4: BPF1.4 R43.2 | length 209.3
  Top Layer w10: BPF1.4@2727.39,3604.43 2811.57,3604.43 2890.5,3525.5 R43.2@2904,3525.5
F1P5: BPF1.5 R43.1 R47.2 | length 426
  Top Layer w10: BPF1.5@2727.39,3630.02 2843.98,3630.02 2885.5,3588.5 R43.1@2904,3588.5 2964.5,3588.5 3000,3553 R47.2@3000,3431.5
F1P10: BPF1.10 R51.2 R57.1 | length 433.1
  Top Layer w10: BPF1.10@2727.39,3757.98 2864.47,3757.98 R57.1@2905,3798.5 2963.5,3798.5 3005,3840 R51.2@3005,3961.5
F1P12: BPF1.12 R59.2 | length 262.3
  Top Layer w10: BPF1.12@2727.39,3809.16 2791.16,3809.16 2838,3856 2838,3893.5 R59.2@2905,3960.5
F1P13: BPF1.13 R63.2 | length 245.6
  Top Layer w10: BPF1.13@2727.39,3834.75 2784.75,3834.75 2806.5,3856.5 R63.2@2806.5,4014
F1P14: BPF1.14 R59.1 R63.1 R67.1 | length 576.1
  Top Layer w10: R67.1@2621.5,3999 2621.5,3896.5 2657.66,3860.34 BPF1.14@2727.39,3860.34 2743.5,3876.46 R63.1@2743.5,4014 2785.5,4056 2855,4056 2887.5,4023.5 R59.1@2905,4023.5
F2P1: BPF2.1 R35.1 R40.2 R41.1 | length 479.8
  Top Layer w10: R40.2@3753.5,3286 3859.5,3392.01 R35.1@3859.5,3409 ; BPF2.1@3849.86,3535.66 3859.5,3526.02 R35.1@3859.5,3409 ; R41.1@4026,3379.5 4021.8,3375.3 3900.53,3375.3 3866.83,3409 R35.1@3859.5,3409
F2P2: BPF2.2 R35.2 | length 214.5
  Top Layer w10: BPF2.2@3849.86,3561.25 3904.75,3561.25 3922.5,3543.5 R35.2@3922.5,3409
F2P3: BPF2.3 R30.1 R41.2 | length 517.6
  Top Layer w10: R30.1@3750.5,3407 3750.5,3562.5 3774.84,3586.84 BPF2.3@3849.86,3586.84 3910.16,3586.84 3974,3523 3974,3494.5 R41.2@4026,3442.5
F2P4: BPF2.4 R45.2 | length 206
  Top Layer w10: BPF2.4@3849.86,3612.43 3947.07,3612.43 R45.2@4024,3535.5
F2P5: BPF2.5 R45.1 R49.2 | length 413.8
  Top Layer w10: BPF2.5@3849.86,3638.02 3984.47,3638.02 R45.1@4024,3598.5 4066.5,3598.5 4124,3541 R49.2@4124,3441.5
F2P10: BPF2.10 R52.2 R58.1 | length 434.9
  Top Layer w10: BPF2.10@3849.86,3765.98 3979.47,3765.98 R58.1@4024,3810.5 4079.5,3810.5 4125,3856 R52.2@4125,3978.5
F2P12: BPF2.12 R61.2 | length 293
  Top Layer w10: BPF2.12@3849.86,3817.16 3906.44,3817.16 3952,3862.72 3952,3943 3987.5,3978.5 R61.2@4029,3978.5
F2P13: BPF2.13 R65.2 | length 227.7
  Top Layer w10: BPF2.13@3849.86,3842.75 3903.75,3842.75 3919.5,3858.5 R65.2@3919.5,4010
F2P14: BPF2.14 R61.1 R65.1 R68.1 | length 549.9
  Top Layer w10: R68.1@3757.5,4010 3757.5,3895.5 3784.66,3868.34 BPF2.14@3849.86,3868.34 3849.86,4003.35 R65.1@3856.5,4010 3863.83,4010 3897.53,4043.7 4026.8,4043.7 R61.1@4029,4041.5
"FILTER1 +VS": B20.2 BPF1.8 | length 191
  Top Layer w10: BPF1.8@2727.39,3706.8 2788.2,3706.8 2820.53,3674.47 B20.2@2905,3674.47
"FILTER1 -VS": B18.1 BPF1.23 C48.1 | length 299.9
  Top Layer w10: C48.1@2167,3657.85 2174.62,3665.47 B18.1@2290,3665.47 2297.14,3658.33 2456.95,3658.33 BPF1.23@2459.67,3655.61
"FILTER2 +VS": B21.2 BPF2.8 | length 184.2
  Top Layer w10: BPF2.8@3849.86,3714.8 3941.8,3714.8 3968.53,3741.53 B21.2@4023,3741.53
"FILTER2 -VS": B19.1 BPF2.23 C49.1 | length 316
  Top Layer w10: C49.1@3285,3645.85 3316.62,3677.47 B19.1@3412,3677.47 3471.53,3677.47 3485.39,3663.61 BPF2.23@3582.14,3663.61
FILTERSIGNALOUT1: BPF1.11 R57.2 R69.1 | length 2511.4
  Top Layer w10: R69.1@2414.5,4138 2555,4138 2590,4103 2590,3824 2630.43,3783.57 BPF1.11@2727.39,3783.57 2827.07,3783.57 R57.2@2905,3861.5 2955,3911.5 2955,4082 3008,4135 3779,4135 v1@3847,4203
  PWR w10: v1(3848,4202) 3935,4289 v2(4307,4289)
FILTERSIGNALOUT2: BPF2.11 R58.2 R71.1 | length 1412.4
  Top Layer w10: BPF2.11@3849.86,3791.57 3942.07,3791.57 R58.2@4024,3873.5 4042.5,3873.5 4069.5,3900.5 R71.1@4069.5,4186
  PWR w10: v1(4085,4192) 4810,4192 v2(4907,4289)
GND: *.15 ?.1 ?.2@4709.76,3502.73 BPF1.6 BPF1.7 BPF1.9 BPF1.20 BPF1.22 BPF2.6 BPF2.7 BPF2.9 BPF2.20 BPF2.22 C2.2 C5.1 C6.1 C7.1 C8.1 C9.1 C10.2 C11.1 C16.2 C17.1 C18.2 C23.2 C24.1 C25.2 C30.2 C31.1 C32.2 C37.2 C38.1 C39.2 C40.1 C41.1 C42.1 C43.1 C44.2 C45.2 C46.2 C47.2 C48.2 C49.2 C50.2 C51.2 C52.2 C53.2 C54.1 C55.2 C60.1 C61.1 D1.2 D2.2 D3.2 D4.2 dsPIC33.8 dsPIC33.19 dsPIC33.27 LT1.4 LT2.4 LT3.4 LT4.4 LT5.3 LT5.4 LT6.3 LT6.4 LT3009.2 LT3009.3 LT3009.4 pad.1 pad.2 pad.3 pad.5 pad.6 pad.7 pad.8 pad.9 pad.10 pad.12 pad.13 pad.14 pad.15 pad.18 pad.19 pad.20 pad.21 pad.22 pad.25 pad.26 pad.34 pad.35 pad.36 pad.37 pad.38 pad.39 pad.40 pad.41 pad.42 pad.43 pad.44 pad.45 pad.46 pad.49 pad.50 pad.53 pad.56 pad.57 pad.58 pad.59 pad.61 pad.62 pad.63 pad.64 pad.65 pad.66 pad.68 pad.69 pad.70 R9.1 R14.1 R19.1 R24.1 R47.1 R48.2 R49.1 R50.2 R51.1 R52.1 R53.2 R54.2 R78.1 uP.6 uP.16 uP.20 uP.29 uP.35 uP.39 VoltageReg2.3 VoltageReg2.4 | length 50
  Top Layer w10: LT6.3@4127.32,4423.41 LT6.4@4127.32,4473.41
  other v1: 4740,3115 4538,3116 5344,3117 4940,3118 5141,3118 3493,3489 3193,4312 2776,4870 2615,4891.37
  other v2: 5507,4028 5507,4289 5507,4544 5507,4881
  other v3: 2450,5040
H1FILTEROUT: dsPIC33.5 LT1.6 | length 2464.9
  PWR w8: v1(3223,4259) 3223,4414 3353,4544 v2(4307,4544)
  Bottom Layer w8: v1(3223,4259) 3223,4203.13 dsPIC33.5@3223.62,4202.5
  Bottom Layer w10: LT1.6@2335.59,3909.59 2335.59,4023.59 2411,4099 3187,4099 3223.62,4135.62 dsPIC33.5@3223.62,4202.5
H2FILTEROUT: dsPIC33.3 LT2.6 | length 1836.5
  PWR w8: v1(3325,4260) 3325,4376 3394,4445 4424,4445 4523,4544 v2(4607,4544)
  Bottom Layer w8: dsPIC33.3@3323.62,4202.5 3325,4203.88 v1(3325,4260)
  Bottom Layer w10: dsPIC33.3@3323.62,4202.5 3323.62,4067.38 3388.59,4002.41 LT2.6@3388.59,3918.59
H3FILTEROUT: dsPIC33.4 LT3.6 | length 2587.4
  PWR w8: v1(3273,4259) 3273,4395 3368,4490 4385,4490 4502,4607 4844,4607 v2(4907,4544)
  Bottom Layer w8: v1(3273,4259) 3273,4203.13 dsPIC33.4@3273.62,4202.5
  Bottom Layer w10: LT3.6@2855.59,3897.59 2855.59,4002.59 2913,4060 3201,4060 3273.62,4132.62 dsPIC33.4@3273.62,4202.5